# Altium PCB buttons_pcb.PcbDoc
Units mil, origin at the board's own origin, x right, y up, seen from the top; angles counter-clockwise.
Board outline 1799.82 x 2474.94 mil, 2 copper layers (Top Layer, Bottom Layer); 17 components, 20 nets, 76 pads, 0 vias.
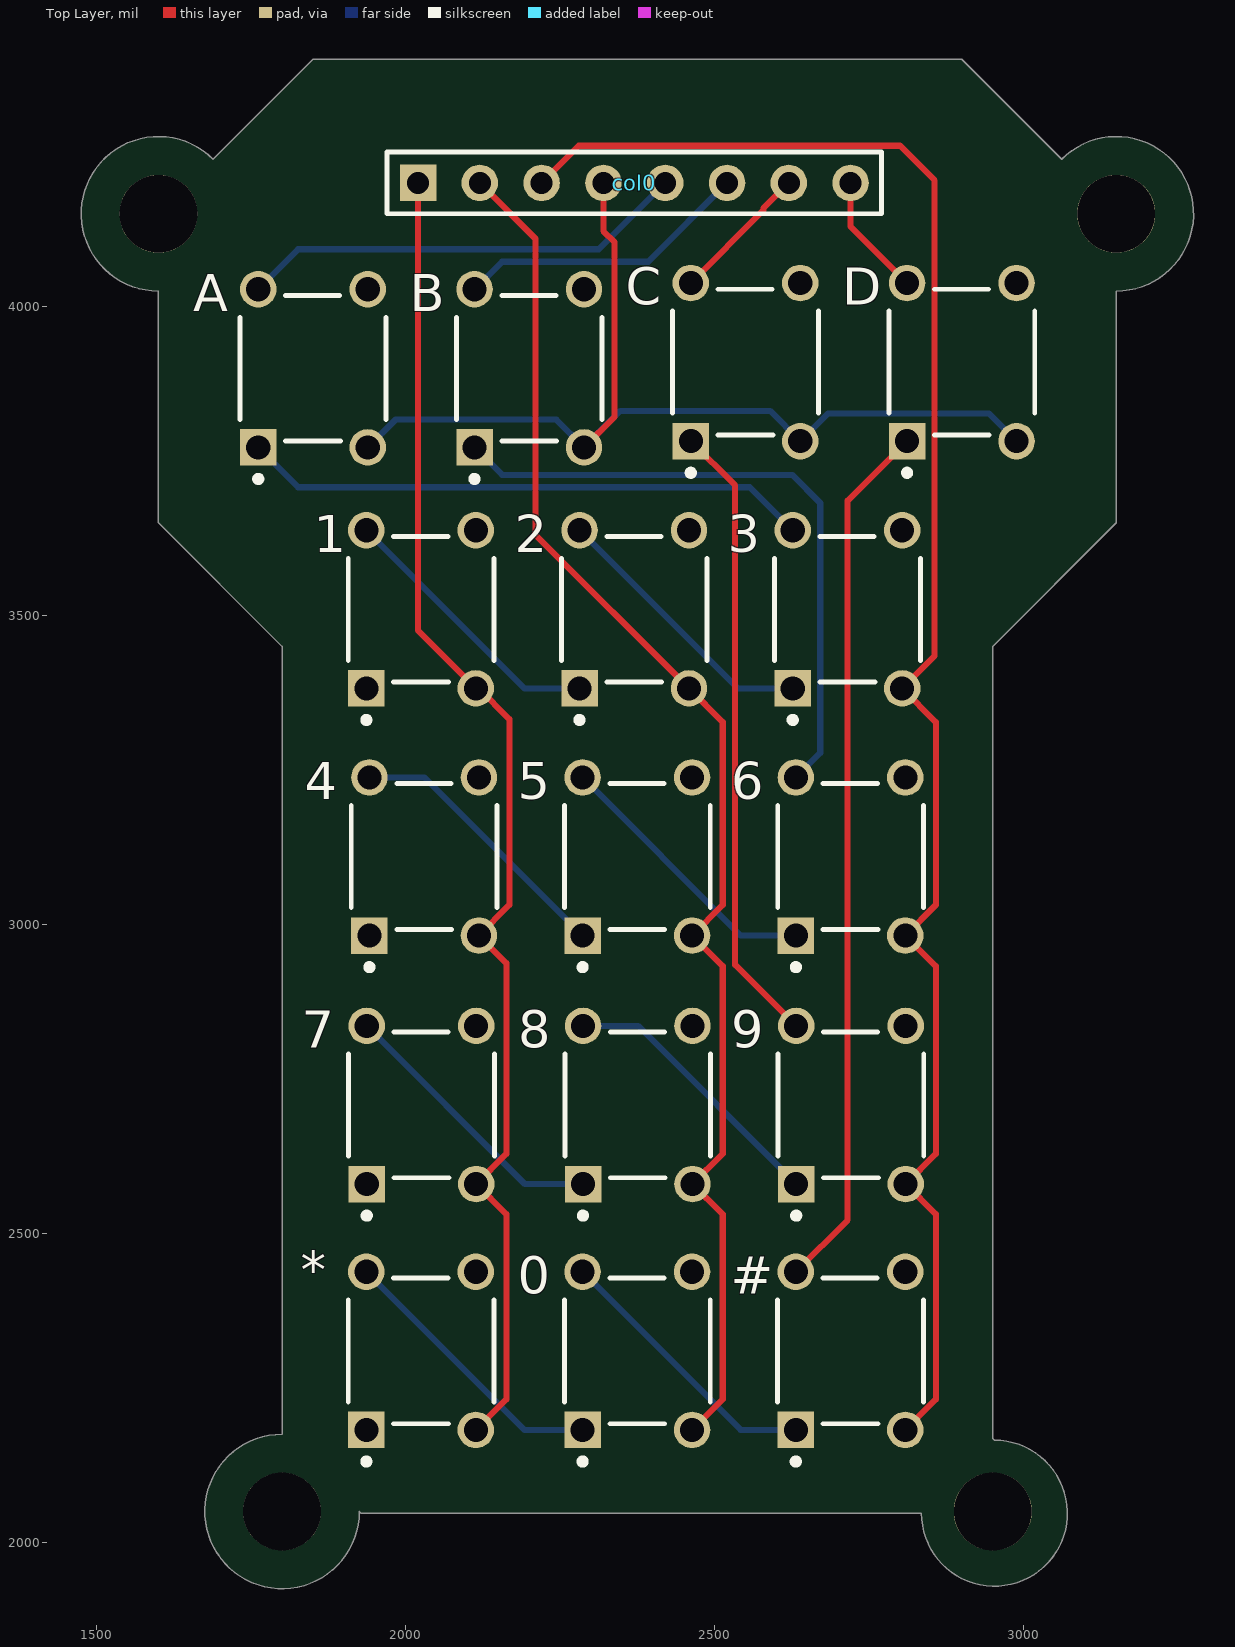
[diagram p0: Top Layer view]
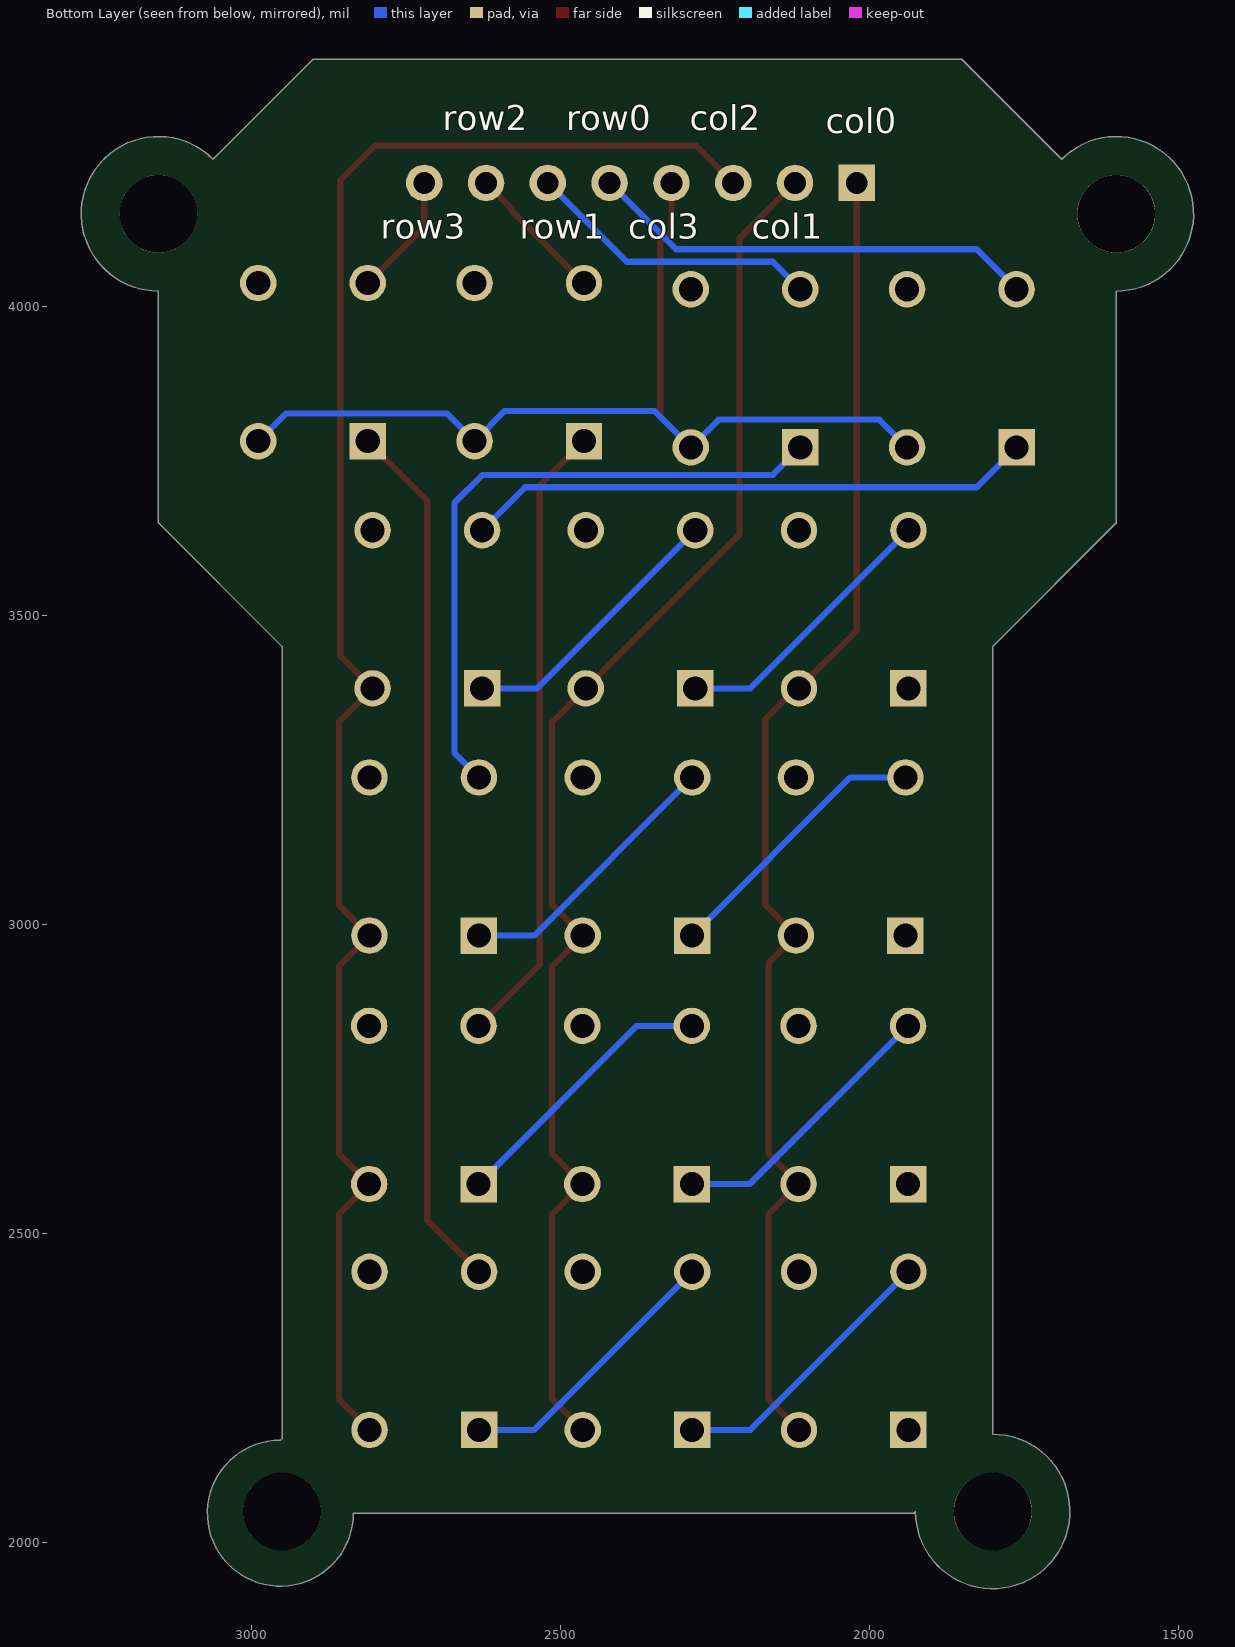
[diagram p1: Bottom Layer view, seen from below]

## Layer stack, top to bottom
Top Solder: solder mask 0.4, Solder Resist, Dk 3.5
Top Layer: signal copper 1.4
Dielectric 1: dielectric 12.6, FR-4, Dk 4.8
Bottom Layer: signal copper 1.4
Bottom Solder: solder mask 0.4, Solder Resist, Dk 3.5

## Board outline
1800,3450 1600,3650 1600,4025 cw(c1600,4150) 1688.39,4238.39 1850,4400 2900,4400 3061.61,4238.39 cw(c3150,4150) 3150,4025 3150,3650 2950,3450 2950,2168.11 2952.76,2165.35 cw(c2952.76,2047.24) 2834.65,2047.24 1927.76,2047.24 1925,2050 cw(c1800,2050) 1800,2175

## Design rules (kind name [scope] priority, off if disabled: settings)
Clearance [All] p1: gap=10 ignorepadtopadclearanceinfootprint=FALSE except(0: Arc-Hole Track-Hole SMDPad-Hole THPad-Hole Via-Hole Fill-Hole Poly-Hole Region-Hole Text-Hole)
PolygonConnect [All] p1: connectstyle=Relief reliefconductorwidth=10 reliefentries=4 polygonreliefangle="90 Angle" airgapwidth=10
RoomDefinition buttons_sch [InComponentClass('buttons_sch')] p1: confinementstyle=ConfineIn formatcopy=TRUE lockcomponents=FALSE outline 1074.91,710 7199.91,710 7199.91,1630 1074.91,1630
RoutingVias [All] p1: holewidth=28 width=50 viastyle="Through Hole" minholewidth=28 minwidth=50 maxholewidth=28 maxwidth=50
SolderMaskExpansion [All] p1: expansion=4 istentingtop=FALSE
Width [All] p1: maxlimit=10 minlimit=10 preferedwidth=10
30 further rules are at their usual default settings.

## Components (designator, comment, footprint, x,y, rotation, side; value= is the part's Value field where it differs from the comment)
0 "1825910-6" TECO-1825910-6_V#1 2374.91,2310 r90 top
1 "1825910-6" TECO-1825910-6_V#2 2024.91,3510 r90 top
2 "1825910-6" TECO-1825910-6_V#1 2369.91,3510 r90 top
3 "1825910-6" TECO-1825910-6_V#1 2714.91,3510 r90 top
4 "1825910-6" TECO-1825910-6_V#1 2029.91,3110 r90 top
5 "1825910-6" TECO-1825910-6_V#1 2374.91,3110 r90 top
6 "1825910-6" TECO-1825910-6_V#1 2720,3110 r90 top
7 "1825910-6" TECO-1825910-6_V#1 2025.55,2707.91 r90 top
8 "1825910-6" TECO-1825910-6_V#1 2375.55,2707.91 r90 top
9 "1825910-6" TECO-1825910-6_V#1 2720.55,2707.91 r90 top
# "1825910-6" TECO-1825910-6_V#1 2719.91,2310 r90 top
* "1825910-6" TECO-1825910-6_V#1 2024.91,2310 r90 top (schematic designator ✱)
A "1825910-6" TECO-1825910-6_V#1 1850,3900 r90 top
B "1825910-6" TECO-1825910-6_V#1 2200,3900 r90 top
C "1825910-6" TECO-1825910-6_V#1 2550,3910 r90 top
col0 "PORTS" HDR1X8 2020,4200 r0 top (schematic designator P1)
D "1825910-6" TECO-1825910-6_V#1 2900,3910 r90 top

## Footprints (in the part's own frame and the unit in brackets; to place one, negate y for a bottom-side part, rotate by r counter-clockwise, add the part's x,y. Pads: shape width x height; smd on the part's side, far side on the other; paste and mask are expansions set on the pad)
HDR1X8 [mm] "Connector; Header; 8 Position"
  rect 1.5x1.5 hole 0.9: 1(0,0)
  round 1.5 hole 0.9: 2(2.54,0) 3(5.08,0) 4(7.62,0) 5(10.16,0) 6(12.7,0) 7(15.24,0) 8(17.78,0)
  silkscreen extent -1.27,-1.27 19.05,1.27
TECO-1825910-6_V#1 [mm] "Switch, 4-Leads, Body 5.99x5.99mm"
  rect 1.5x1.5 hole 0.99: 1(-3.25,2.25)
  round 1.5 hole 0.99: 2(3.25,2.25) 3(-3.25,-2.25) 4(3.25,-2.25)
  silkscreen extent -4.67,-2.99 3,2.99, body extent -3,-2.99 2.99,3, height 5
TECO-1825910-6_V#2 [mm] "Switch, 4-Leads, Body 5.99x5.99mm"
  rect 1.5x1.5 hole 0.99: 1(-3.25,2.25)
  round 1.5 hole 0.99: 2(3.25,2.25) 4(3.25,-2.25) ""(-3.25,-2.25)
  silkscreen extent -4.67,-2.99 3,2.99, body extent -3,-2.99 2.99,3, height 5

## Part data
0 1 2 3 4 5 6 7 8 9 # * A B C D: library part CMP-1684-00021-1, "Tact Switch, SPST-NO, 0.05 A, -35 to 85 degC, 4-Pin THD, RoHS, Bulk", Actuator Color=Black, Contact Rating @ Voltage=0.05A@24VDC, Dielectric Strength=500VAC, Manufacturer="TE Connectivity", Maximum AC Voltage Rating=N/A, Maximum Contact Resistance=100mOhm, Maximum DC Voltage Rating=24V, Minimum Insulation Resistance=100MOhm, Operating Temperature=-35to85C, Package Description="4-Pin Through Hole Device, Body 5.99 x 5.99 mm, Pitch 6.5 mm", Package Reference=THD, Actuator Length=1.4mm, Actuator Material=PolybutyleneTerephthalate, Actuator Style=RoundButton, Base Material=N/A, Body Orientation=Straight, Bushing Type=Unthreaded, Contact Material=CopperAlloy, Contact Plating=Silver, Datasheet URL=http://www.te.com/commerce/DocumentDelivery/DDEController?Action=showdoc&DocId=Customer+Drawing%7F1825910%7FC9%7Fpdf%7FEnglish%7FENG_CD_1825910_C9.pdf%7F1825910-6, Datasheet Version="Rev. C9", Dimension=5.99x5mm, Electrical Life=100000Cycles, Family=1825910, Function=MomentaryContact, Housing Material=N/A, Illumination=N/R, Manufacturer URL=http://www.te.com, Mechanical Life=100000Cycles, Mounting=ThroughHole, Packaging=N/A, Part No=1825910-6, Pole Throw Configuration=SPST, Product Weight=N/A, RoHS=Yes, Seal Description=N/A, Seal Location=N/A, Switch Configuration=OFF(ON), Terminal Type=PCPins, Thread Size=N/R
col0: library part "Header 8", "Header, 8-Pin", LatestRevisionDate=17-Jul-2002, LatestRevisionNote="Re-released for DXP Platform.", Publisher="Altium Limited"

## Free pads (board coordinates)
  round 125.98 hole 125.98: 7(1600,4150) 8(3150,4150) 9(2950,2050) 10(1800,2050)

## Nets (pads, with @x,y where several pads share a name; then routed paths per layer and width w, separated by ;. In a path a pad name is that pad's centre, name@x,y a point inside that pad or via, vN(x,y) a via of type N, cw(c..) or ccw(c..) an arc to the next point about the centre after c; other vN are vias at no path point)
col_0: 1. 4.3 7.3 *.3 col0.1 | length 2181.8
  Top Layer w10: col0.1 2020,3475.54 1. 2117.96,3382.04 2168,3332 2168,3031.55 4.3 2163,2937.54 2163,2628.83 7.3 2163,2531.09 2163,2231.55 *.3
col_1: 0.3 2.3 5.3 8.3 col0.2 | length 2282.7
  Top Layer w10: col0.2 2210,4110 2210,3630.54 2.3 2513,3327.54 2513,3031.55 5.3 2513,2932.54 2513,2628.83 8.3 2513,2531.09 2513,2231.55 0.3
col_2: 3.3 6.3 9.3 #.3 col0.3 | length 2852.3
  Top Layer w10: col0.3 2280,4260 2800,4260 2856,4204 2856,3434.55 3.3 2858,3327.54 2858,3031.47 6.3 2858,2932.63 2858,2628.83 9.3 2858,2531.09 2858,2231.55 #.3
col_3: A.3 B.3 C.3 col0.4 D.3 | length 1625.1
  Top Layer w10: B.3 2338,3821.47 2338,4104 2320,4122 col0.4
  Bottom Layer w10: A.3 1983.53,3817 2243.63,3817 B.3 2347.53,3831 2589.63,3831 C.3 2683.53,3827 2943.63,3827 D.3
Net0_1: 0.1 *.2 | length 456
  Bottom Layer w10: *.2 2192.23,2182.04 0.1
Net0_2: 0.2 #.1 | length 451
  Bottom Layer w10: 0.2 2542.23,2182.04 #.1
Net1_2: 1.2 2.1 | length 451
  Bottom Layer w10: 1.2 2192.23,3382.04 2.1
Net2_2: 2.2 3.1 | length 451
  Bottom Layer w10: 2.2 2537.23,3382.04 3.1
Net3_2: 3.2 A.1 | length 920.5
  Bottom Layer w10: A.1 1825.95,3707.52 2556.76,3707.52 3.2
Net4_2: 4.2 5.1 | length 451
  Bottom Layer w10: 4.2 2030.42,3237.95 5.1
Net5_2: 5.2 6.1 | length 451.1
  Bottom Layer w10: 5.2 2542.23,2982.05 6.1
Net6_2: 6.2 B.1 | length 1057.3
  Bottom Layer w10: B.1 2155.95,3727.52 2625.48,3727.52 2671,3682 2671,3277.53 6.2
Net7_2: 7.2 8.1 | length 456
  Bottom Layer w10: 7.2 2192.87,2579.96 8.1
Net8_2: 8.2 9.1 | length 451
  Bottom Layer w10: 8.2 2376.06,2835.87 9.1
Net9_2: 9.2 C.1 | length 1016.8
  Top Layer w10: C.1 2533,3710.47 2533,2934.83 9.2
Net#_2: #.2 D.1 | length 1418.7
  Top Layer w10: #.2 2715,2521.62 2715,3685.63 D.1
row_0: A.2 col0.5 | length 729.8
  Bottom Layer w10: A.2 1825.95,4092.48 2312.48,4092.48 col0.5
row_1: B.2 col0.6 | length 479.8
  Bottom Layer w10: B.2 2155.95,4072.48 2392.48,4072.48 col0.6
row_2: C.2 col0.7 | length 227.7
  Top Layer w10: C.2 2579,4155.53 2579,4159 col0.7
row_3: col0.8 D.2 | length 199.9
  Top Layer w10: col0.8 2720,4129.37 D.2
pads on no net: 0.4 1.1 1.4 2.4 3.4 4.1 4.4 5.4 6.4 7.1 7.4 8.4 9.4 #.4 *.1 *.4 A.4 B.4 C.4 D.4

## Silkscreen, mask and mechanical layers (free items; w line width, h text height)
Bottom Overlay:
  text "col2" at 2290,4285 h40
  text "row0" at 2490,4285 h40
  text "row2" at 2690,4285 h40
  text "col1" at 2190,4110 h40
  text "col3" at 2390,4110 h40
  text "row1" at 2565,4110 h40
  text "row3" at 2790,4110 h40
Mechanical 1:
  lines w10: 1925,2050 cw(c1800,2050) 1800,2175 1800,3450 ; 1927.76,2047.24 2834.65,2047.24 ccw(c2952.76,2047.24) 2952.76,2165.35 ; 2950,2168.11 2950,3450 3150,3650 3150,4025 ccw(c3150,4150) 3061.61,4238.39 2900,4400 1850,4400 1688.39,4238.39 ccw(c1600,4150) 1600,4025 1600,3650 ; 1600,3650 1800,3450 ; 1600,3650 1800,3450